# Altium PCB MAGI'sMicroSD_SDIO.PcbDoc
Units mil, origin at the board's own origin, x right, y up, seen from the top; angles counter-clockwise.
Board outline 6000 x 4000 mil, 2 copper layers (Top Layer, Bottom Layer); 5 components, 8 nets, 83 pads, 6 vias.
Unrouted connection lines stored in the file: 1.
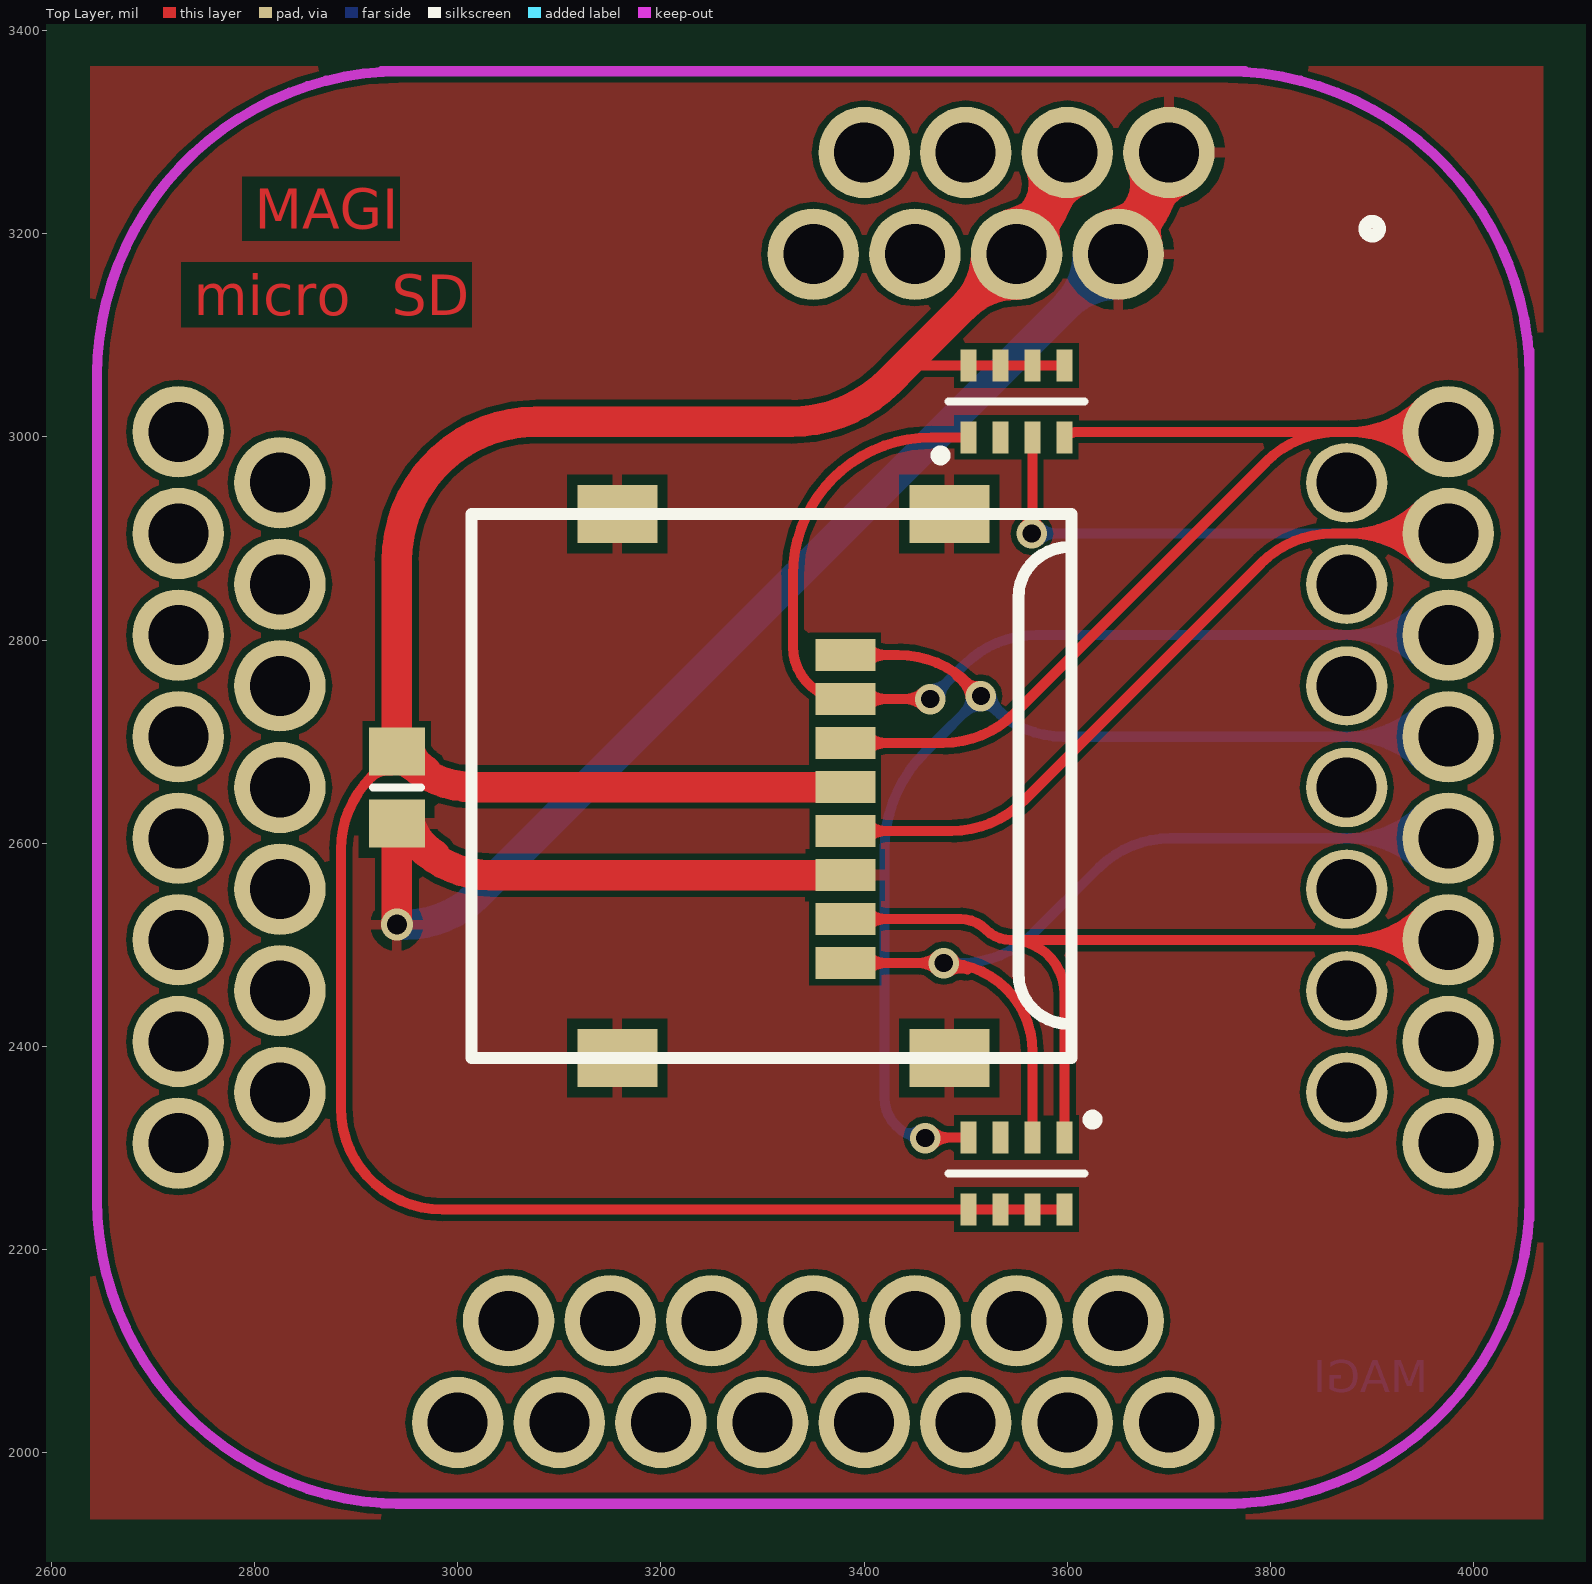
[diagram p0: Top Layer view]
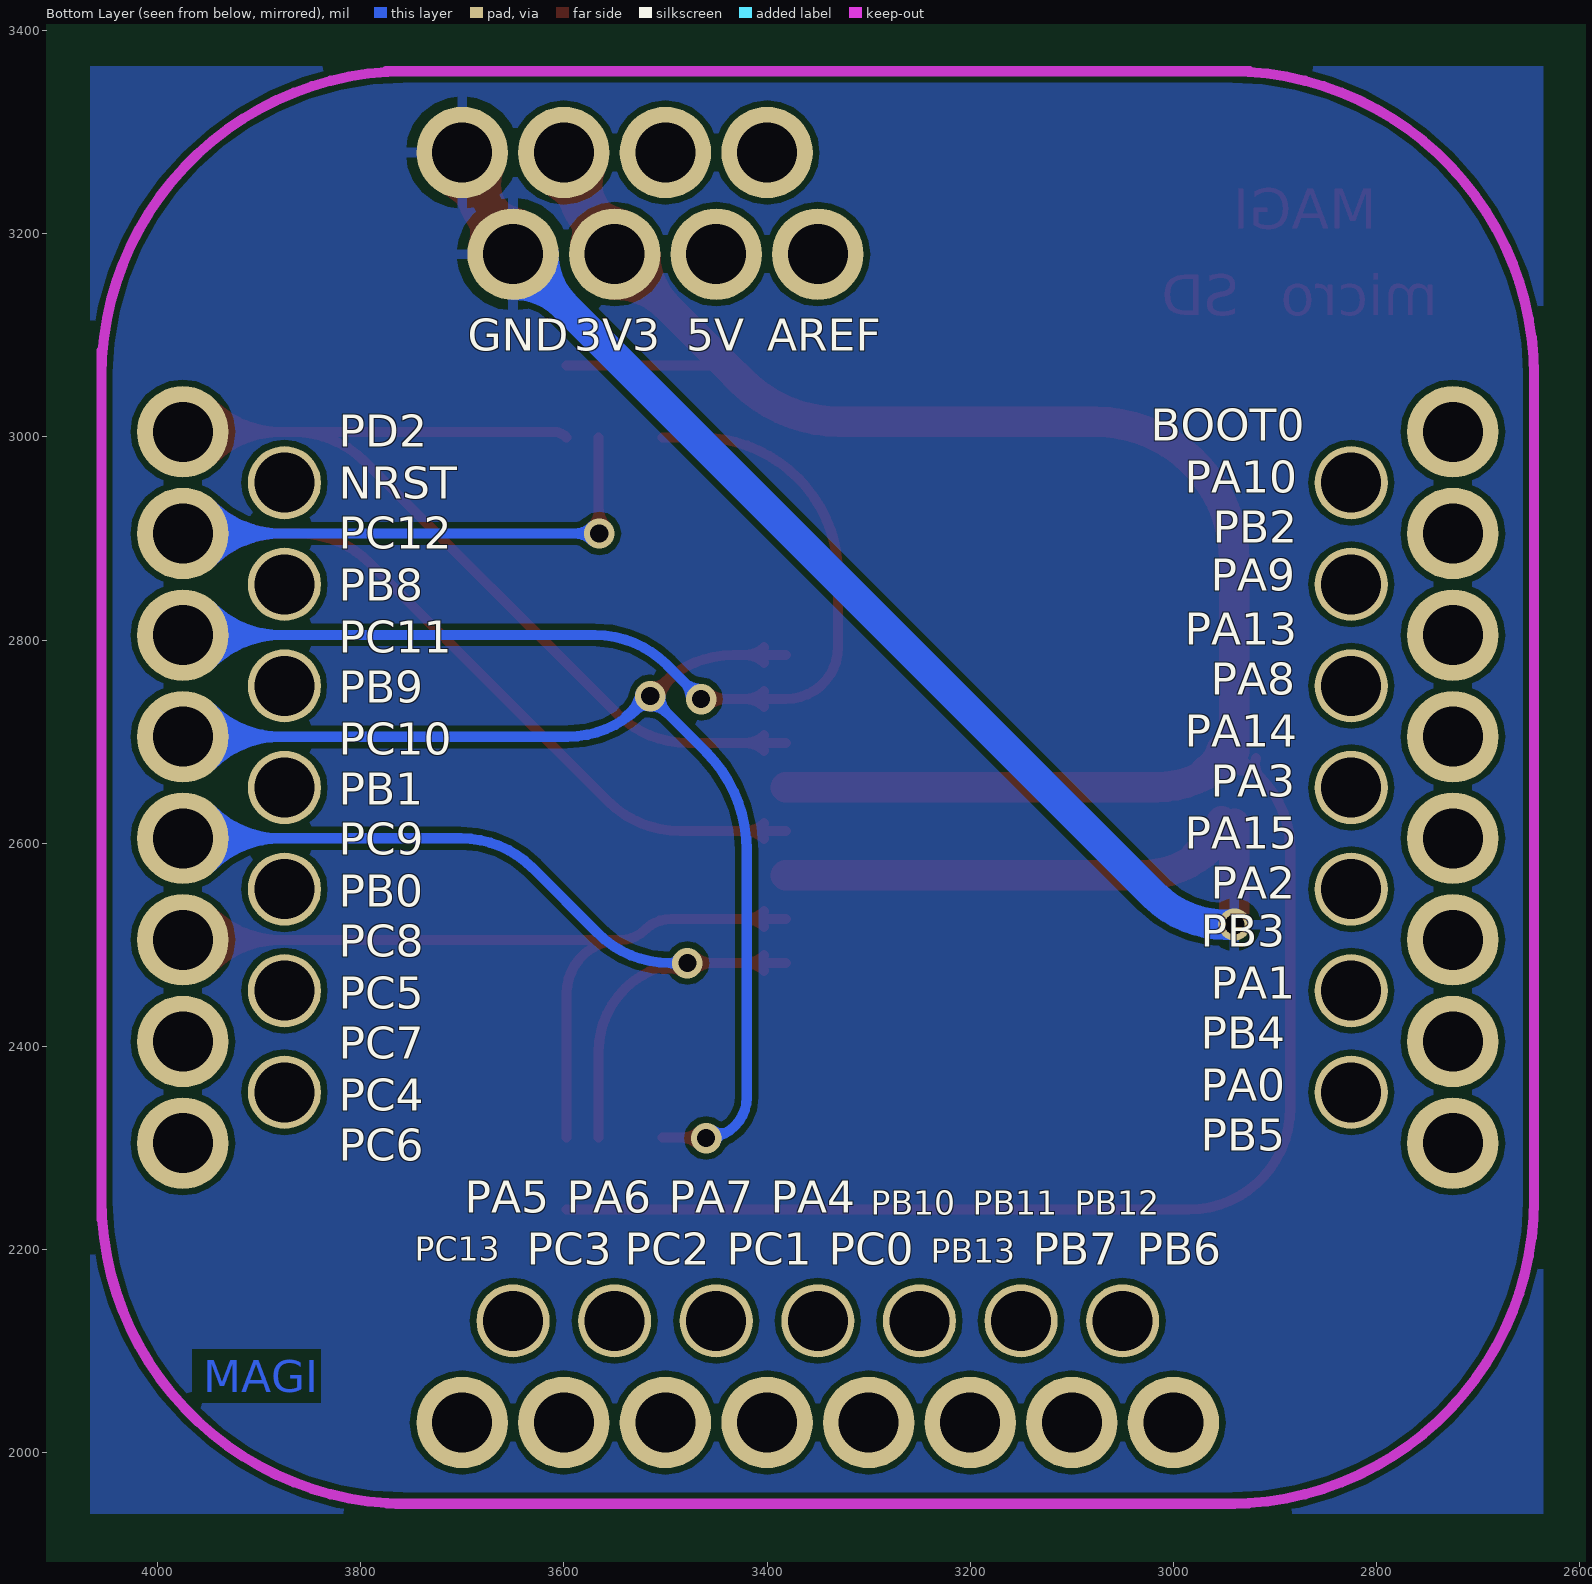
[diagram p1: Bottom Layer view, seen from below]

## Layer stack, top to bottom
Top Solder: solder mask 0.4, Solder Resist, Dk 3.5
Top Layer: signal copper 1.4
Dielectric 1: dielectric 12.6, FR-4, Dk 4.8
Bottom Layer: signal copper 1.4
Bottom Solder: solder mask 0.4, Solder Resist, Dk 3.5

## Board outline
1000,1000 7000,1000 7000,5000 1000,5000

## Design rules (kind name [scope] priority, off if disabled: settings)
Clearance [All] p1: gap=6
PolygonConnect [All] p1: connectstyle=Relief reliefconductorwidth=10 reliefentries=4 polygonreliefangle="90 Angle" airgapwidth=10
RoutingVias [All] p1: holewidth=28 width=50 viastyle="Through Hole" minholewidth=28 minwidth=50 maxholewidth=28 maxwidth=50
SolderMaskExpansion [All] p1: expansion=4
Width [All] p1: maxlimit=100 minlimit=6 preferedwidth=30
29 further rules are at their usual default settings.

## Components (designator, comment, footprint, x,y, rotation, side; value= is the part's Value field where it differs from the comment)
C1 "10uf" 6-0805_N 2940,2655 r270 top
J1 "MAGIsBoard-2x" MAGIsBoard-2x 3350,2655 r0 top
J2 "MicroSD" microsd 3285,2560 r270 top
R1 "0603*4" 0603*4 3550,3035 r90 top
R2 "0603*4" 0603*4 3550,2275 r270 top

## Footprints (in the part's own frame and the unit in brackets; to place one, negate y for a bottom-side part, rotate by r counter-clockwise, add the part's x,y. Pads: shape width x height; smd on the part's side, far side on the other; paste and mask are expansions set on the pad)
6-0805_N [mm] "Chip Resistor, Body 2.0x1.2mm, IPC Medium Density"
  rect 1.2x1.4 smd: 1(-0.9,0) 2(0.9,0)
  silkscreen extent 0,-0.6 0,0.6, body extent -1.07,-0.7 1.07,0.7, height 0.7
0603*4 [mm]
  rect 0.8x0.4 smd: 1(-0.9,1.2) 2(-0.9,0.4) 3(-0.9,-0.4) 4(-0.9,-1.2) 5(0.9,-1.2) 6(0.9,-0.4) 7(0.9,0.4) 8(0.9,1.2)
  silkscreen extent -1.47,-1.7 0,2.02
MAGIsBoard-2x [mil]
  round 90 hole 59.06: 1(300,525) 1(350,625) 2(200,525) 2(250,625) 3(100,525) 3(150,625) 4(0,525) 4(50,625) 29(-625,350) 30(-625,250) 31(-625,150) 32(-625,50) 33(-625,-50) 34(-625,-150) 35(-625,-250) 36(-625,-350) 37(-350,-625) 38(-250,-625) 39(-150,-625) 40(-50,-625) 41(50,-625) 42(150,-625) 43(250,-625) 44(350,-625) 45(625,-350) 46(625,-250) 47(625,-150) 48(625,-50) 49(625,50) 50(625,150) 51(625,250) 52(625,350)
  round 90 / inner round 72 / far side round 72 hole 59.06: 8(-525,300) 9(-525,200) 10(-525,100) 11(-525,0) 12(-525,-100) 13(-525,-200) 14(-525,-300) 15(-300,-525) 16(-200,-525) 17(-100,-525) 18(0,-525) 19(100,-525) 20(200,-525) 21(300,-525)
  oval 80x78 / inner round 72 / far side round 72 hole 59.06: 22(525,-300) 23(525,-200) 24(525,-100) 25(525,0) 26(525,100) 27(525,200) 28(525,300)
  Keep-Out Layer lines w10: -705,-415 -705,415 ; -705,-405 ccw(c-405,-405) -405,-705 ; -705,405 cw(c-405,405) -405,705 ; -425,705 425,705 ; -410,-705 415,-705 ; 405,-705 ccw(c405,-405) 705,-405 ; 405,705 cw(c405,405) 705,405 ; 705,-425 705,430
  silkscreen extent 543,543 557,557
microsd [mm]
  rect 1.45x2 smd: 0(-9.25,5.05) 0(-9.25,-3.25) 0(4.35,5.05) 0(4.35,-3.25)
  rect 0.8x1.5 smd: 1(-5.725,2.45) 2(-4.625,2.45) 3(-3.525,2.45) 4(-2.425,2.45) 5(-1.325,2.45) 6(-0.225,2.45) 7(0.875,2.45) 8(1.975,2.45)
  silkscreen extent -9.25,-6.9 4.35,8.1

## Part data
C1: library part "CAPACITOR POL", "Capacitor"

## Via types
v1: diameter 30, hole 18, Top Layer to Bottom Layer, 5 vias
v2: diameter 31.5, hole 19.68, Top Layer to Bottom Layer, 1 vias

## Nets (pads, with @x,y where several pads share a name; then routed paths per layer and width w, separated by ;. In a path a pad name is that pad's centre, name@x,y a point inside that pad or via, vN(x,y) a via of type N, cw(c..) or ccw(c..) an arc to the next point about the centre after c; other vN are vias at no path point)
3.3V: C1.1 J1.2 J2.4 R1.5 R1.6 R1.7 R1.8 R2.5 R2.6 R2.7 R2.8 | length 3241.9
  Top Layer w10: C1.1@2918.57,2684.05 cw(c2901.27,2677.74) 2914.29,2664.72 ; C1.1@2934.28,2671.9 ccw(c2931.89,2647.13) 2914.29,2664.72 ; C1.1 2914.29,2664.72 ; 3440,3070 cw(c3441.05,3068.95) 3441.05,3070.43 R1.8 R1.7 R1.6 R1.5 ; R2.8 R2.7 R2.6 R2.5 2985,2239.57 cw(c2985,2339.57) 2885,2339.57 2885,2594.01 cw(c2985,2594.01) 2914.29,2664.72
  Top Layer w30: C1.1@2952.27,2692.66 ccw(c2985.71,2701.63) 2968.4,2671.64 ; J2.4 3016.38,2655.47 cw(c3016.38,2755.47) 2945.67,2684.76 C1.1 2940,2878 cw(c3077,2878) 3077,3015 3328.25,3015 ccw(c3328.25,3152) 3425.13,3055.13 3440,3070 3564.64,3194.64 ccw(c3479.29,3280) J1.2@3600,3280 ; J1.2@3520,3180 cw(c3447.57,3180) 3498.79,3128.79 cw(c3550,3077.57) J1.2@3550,3150 ; J1.2@3542.24,3208.98 ccw(c3518.75,3296.61) J1.2@3597.33,3251.25 ; J1.2@3564.12,3218.04 ccw(c3533.27,3248.89) J1.2@3572.81,3267.32 ; J1.2@3575.82,3262.24 cw(c3535.47,3232.61) 3583.83,3219.65 cw(c3632.19,3206.69) J1.2@3612.06,3252.53 ; J1.2@3578.98,3187.76 cw(c3631.26,3201.77) 3584.38,3228.84
CLK: J1.51 J2.5 R1.3 | length 2010.2
  Top Layer w10: J2.5 3485.74,2612.17 ccw(c3485.74,2712.17) 3556.45,2641.45 3790.71,2875.71 cw(c3861.42,2805) 3861.42,2905 J1.51 ; J2.5@3402.84,2604.57 cw(c3421.18,2586.22) 3421.18,2612.17 cw(c3421.18,2638.11) J2.5@3402.84,2619.77 ; v1@3557.93,2912.07 ccw(c3539.05,2930.95) 3565.75,2930.95 ; v1(3565,2905) ccw(c3563.19,2906.81) 3565.75,2906.81 R1.3 ; 3565.75,2927.34 ccw(c3587.34,2927.34) v1@3572.07,2912.07 ; J1.51@3946.72,2876.72 ccw(c3878.43,2808.43) 3878.43,2905 ccw(c3878.43,3001.57) J1.51@3946.72,2933.28 ; J1.51@3953.79,2883.79 ccw(c3902.57,2832.57) 3902.57,2905 ccw(c3902.57,2977.43) J1.51@3953.79,2926.21 ; J1.51@3960.86,2890.86 ccw(c3926.72,2856.72) 3926.72,2905 ccw(c3926.72,2953.28) J1.51@3960.86,2919.14
  Bottom Layer w10: v1(3565,2905) J1.51 ; v1@3572.07,2897.93 cw(c3589.14,2880.86) 3589.14,2905 cw(c3589.14,2929.14) v1@3572.07,2912.07 ; J1.51@3946.72,2876.72 ccw(c3878.43,2808.43) 3878.43,2905 ccw(c3878.43,3001.57) J1.51@3946.72,2933.28 ; J1.51@3953.79,2883.79 ccw(c3902.57,2832.57) 3902.57,2905 ccw(c3902.57,2977.43) J1.51@3953.79,2926.21 ; J1.51@3960.86,2890.86 ccw(c3926.72,2856.72) 3926.72,2905 ccw(c3926.72,2953.28) J1.51@3960.86,2919.14
CMD: J1.52 J2.3 R1.4 | length 1364.5
  Top Layer w10: J2.3 3477.36,2698.78 ccw(c3477.36,2798.78) 3548.07,2728.07 3795.71,2975.71 cw(c3866.42,2905) 3866.42,3005 ; J2.3@3402.84,2691.18 cw(c3421.18,2672.83) 3421.18,2698.78 cw(c3421.18,2724.73) J2.3@3402.84,2706.38 ; R1.4 cw(c3610.36,2986.45) 3610.36,3005 3866.42,3005 ; J1.52@3946.72,2976.72 ccw(c3878.43,2908.43) 3878.43,3005 ccw(c3878.43,3101.57) J1.52@3946.72,3033.28 ; J1.52@3953.79,2983.79 ccw(c3902.57,2932.57) 3902.57,3005 ccw(c3902.57,3077.43) J1.52@3953.79,3026.21 ; J1.52@3960.86,2990.86 ccw(c3926.72,2956.72) 3926.72,3005 ccw(c3926.72,3053.28) J1.52@3960.86,3019.14 ; J1.52 3866.42,3005
D0: J1.47 J2.7 R2.1 | length 1206
  Top Layer w10: J2.7 3494.53,2525.55 cw(c3494.53,2489.53) 3520,2515 ccw(c3544.14,2539.14) 3544.14,2505 ; J2.7@3402.84,2517.95 cw(c3421.18,2499.6) 3421.18,2525.55 cw(c3421.18,2551.5) J2.7@3402.84,2533.15 ; R2.1 3597.24,2451.9 ccw(c3544.14,2451.9) 3544.14,2505 ; J1.47@3946.72,2476.72 ccw(c3878.43,2408.43) 3878.43,2505 ccw(c3878.43,2601.57) J1.47@3946.72,2533.28 ; J1.47@3953.79,2483.79 ccw(c3902.57,2432.57) 3902.57,2505 ccw(c3902.57,2577.43) J1.47@3953.79,2526.21 ; J1.47@3960.86,2490.86 ccw(c3926.72,2456.72) 3926.72,2505 ccw(c3926.72,2553.28) J1.47@3960.86,2519.14 ; J1.47 3544.14,2505
D1: J1.48 J2.8 R2.2 | length 1336.7
  Top Layer w10: J2.8 v1(3478.35,2482.24) cw(c3478.35,2394.84) 3565.75,2394.84 R2.2 ; J2.8@3402.84,2474.64 cw(c3421.18,2456.3) 3421.18,2482.24 cw(c3421.18,2508.19) J2.8@3402.84,2489.84 ; v1@3471.28,2475.17 ccw(c3454.2,2458.1) 3454.2,2482.24 ccw(c3454.2,2506.39) v1@3471.28,2489.32 ; v1@3483.36,2473.59 cw(c3495.45,2452.7) 3501.67,2476.02 cw(c3507.9,2499.35) v1@3487,2487.25
  Bottom Layer w10: v1(3478.35,2482.24) 3495.82,2482.24 ; v1@3486.97,2477.18 cw(c3495.82,2471.97) 3495.82,2482.24 ; v1@3486.97,2487.31 ccw(c3495.82,2492.51) 3495.82,2482.24 ; J1.48@3946.72,2576.72 ccw(c3878.43,2508.43) 3878.43,2605 ccw(c3878.43,2701.57) J1.48@3946.72,2633.28 ; J1.48@3953.79,2583.79 ccw(c3902.57,2532.57) 3902.57,2605 ccw(c3902.57,2677.43) J1.48@3953.79,2626.21 ; J1.48@3960.86,2590.86 ccw(c3926.72,2556.72) 3926.72,2605 ccw(c3926.72,2653.28) J1.48@3960.86,2619.14 ; J1.48 3701.42,2605 ccw(c3701.42,2505) 3630.71,2575.71 3566.53,2511.53 cw(c3495.82,2582.24) 3495.82,2482.24
D2: J1.49 J2.1 R2.4 | length 1741.9
  Top Layer w10: J2.1 3433.18,2785.39 cw(c3433.18,2685.39) 3503.9,2756.1 ; J2.1@3402.84,2777.79 cw(c3421.18,2759.45) 3421.18,2785.39 cw(c3421.18,2811.34) J2.1@3402.84,2792.99 ; v1@3467.07,2302.93 cw(c3485.19,2284.81) 3485.19,2310.43 ; v1@3467.07,2317.07 ccw(c3483.1,2333.1) 3483.1,2310.43 ; v1@3470,2310 3470.43,2310.43 R2.4 ; 3491.26,2764.89 cw(c3472.06,2737.29) v1@3505.16,2743.23 ; 3502.27,2757.24 ccw(c3510.64,2769.27) v1@3513.23,2754.84 ; v1@3505.6,2748.42 ccw(c3498.71,2750.92) 3503.9,2756.1 ; v1@3505.63,2748.48 ccw(c3499.04,2750.92) 3503.05,2756.69 ccw(c3510.14,2766.9) v1@3512.84,2754.76 ; v1@3511.58,2754.4 cw(c3509.08,2761.29) 3503.9,2756.1 ; v1(3515,2745) 3503.9,2756.1
  Bottom Layer w10: v1@3450.83,2306.02 ccw(c3435.75,2299.49) 3440,2315.36 ccw(c3444.25,2331.23) v1@3454.04,2318.03 ; v1(3460,2310) cw(c3460,2350) 3420,2350 3420,2593.25 cw(c3557,2593.25) 3460.13,2690.13 v1(3515,2745) 3525.71,2734.29 ccw(c3596.42,2805) 3596.42,2705 J1.49 ; v1@3505,2745 cw(c3480.86,2745) 3497.93,2727.93 cw(c3515,2710.86) v1@3515,2735 ; v1@3516.79,2735.16 cw(c3519.46,2720.54) 3527.91,2732.77 ; v1@3524.84,2746.79 ccw(c3557.72,2752.79) 3538.71,2725.3 ; J1.49@3946.72,2676.72 ccw(c3878.43,2608.43) 3878.43,2705 ccw(c3878.43,2801.57) J1.49@3946.72,2733.28 ; J1.49@3953.79,2683.79 ccw(c3902.57,2632.57) 3902.57,2705 ccw(c3902.57,2777.43) J1.49@3953.79,2726.21 ; J1.49@3960.86,2690.86 ccw(c3926.72,2656.72) 3926.72,2705 ccw(c3926.72,2753.28) J1.49@3960.86,2719.14
D3: J1.50 J2.2 R1.1 | length 1480.1
  Top Layer w10: J2.2@3402.84,2734.49 cw(c3421.18,2716.14) 3421.18,2742.09 cw(c3421.18,2768.03) J2.2@3402.84,2749.69 ; v1@3457.89,2735.02 ccw(c3440.82,2717.94) 3440.82,2742.09 ccw(c3440.82,2766.23) v1@3457.89,2749.16 ; v1@3470,2740 ccw(c3464.96,2734.96) v1(3464.96,2742.09) J2.2 cw(c3381.46,2793.54) 3330,2793.54 3330,2864.22 cw(c3464.66,2864.22) 3369.44,2959.44 cw(c3466.31,2862.57) 3466.31,2999.57 R1.1
  Bottom Layer w10: v1(3464.96,2742.09) 3498.59,2775.71 cw(c3569.3,2705) 3569.3,2805 J1.50 ; v1@3464.96,2752.09 ccw(c3464.96,2776.23) 3482.03,2759.16 ccw(c3499.1,2742.09) v1@3474.96,2742.09 ; J1.50@3946.72,2776.72 ccw(c3878.43,2708.43) 3878.43,2805 ccw(c3878.43,2901.57) J1.50@3946.72,2833.28 ; J1.50@3953.79,2783.79 ccw(c3902.57,2732.57) 3902.57,2805 ccw(c3902.57,2877.43) J1.50@3953.79,2826.21 ; J1.50@3960.86,2790.86 ccw(c3926.72,2756.72) 3926.72,2805 ccw(c3926.72,2853.28) J1.50@3960.86,2819.14
GND: C1.2 J1.1 J2.0 J2.6 | length 2065.4
  Top Layer w30: v2(2940,2520) C1.2 2961.42,2598.15 ccw(c3032.13,2668.86) 3032.13,2568.86 J2.6 ; C1.2@2952.27,2621.8 ccw(c3004.72,2635.85) 2977.57,2588.82 ; J1.1@3642.24,3208.98 ccw(c3618.75,3296.61) J1.1@3697.33,3251.25 ; J1.1@3650,3180 3664.64,3194.64 ccw(c3579.29,3280) J1.1@3700,3280 ; J1.1@3664.12,3218.04 ccw(c3633.27,3248.89) J1.1@3672.81,3267.32 ; J1.1@3675.82,3262.24 cw(c3635.47,3232.61) 3683.83,3219.65 cw(c3732.19,3206.69) J1.1@3712.06,3252.53 ; J1.1@3678.98,3187.76 cw(c3731.26,3201.77) 3684.38,3228.84
  Bottom Layer w30: v2(2940,2520) 2948.58,2520 ccw(c2948.58,2620) 3019.29,2549.29 J1.1@3650,3180 ; J1.1@3620,3180 cw(c3547.57,3180) 3598.79,3128.79 cw(c3650,3077.57) J1.1@3650,3150
pads on no net: J1.3 J1.4 J1.8 J1.9 J1.10 J1.11 J1.12 J1.13 J1.14 J1.15 J1.16 J1.17 J1.18 J1.19 J1.20 J1.21 J1.22 J1.23 J1.24 J1.25 J1.26 J1.27 J1.28 J1.29 J1.30 J1.31 J1.32 J1.33 J1.34 J1.35 J1.36 J1.37 J1.38 J1.39 J1.40 J1.41 J1.42 J1.43 J1.44 J1.45 J1.46 R1.2 R2.3

## Polygon pours and split planes (outlines as drawn)
GND on Top Layer "Bottom Layer-No Net" (solid, pour order 2): 2638.2,3365 4068.2,3365 4068.2,1934.66 2638.2,1934.66
GND on Bottom Layer "Bottom Layer-No Net" (solid, pour order 4): 2636.22,3365 4066.22,3365 4066.22,1940 2636.22,1940

## Other copper
Top Layer:
  text "MAGI" at 2800,3205 h39.37
  text "micro" at 2740,3120 h40
  text "SD" at 2935,3120 h40

## Text inside footprints (layer, text, board x,y; h text height)
J1: Bottom Overlay "NRST" at 3821.54,2939.33 h31.5; Bottom Overlay "PB8" at 3821.54,2838.94 h31.5; Bottom Overlay "PB9" at 3821.54,2738.54 h31.5; Bottom Overlay "PB1" at 3821.54,2638.15 h31.5; Bottom Overlay "PB0" at 3821.54,2537.76 h31.5; Bottom Overlay "PC5" at 3821.54,2437.36 h31.5; Bottom Overlay "PC4" at 3821.54,2336.97 h31.5; Bottom Overlay "PA0" at 2973.11,2346.81 h31.5; Bottom Overlay "PA1" at 2963.27,2447.2 h31.5; Bottom Overlay "PA2" at 2963.27,2545.63 h31.5; Bottom Overlay "PA3" at 2963.27,2646.02 h31.5; Bottom Overlay "PA8" at 2963.27,2746.42 h31.5; Bottom Overlay "PA9" at 2963.27,2848.78 h31.5; Bottom Overlay "PA10" at 2988.86,2945.24 h31.5; Bottom Overlay "BOOT0" at 3022.32,2996.42 h31.5; Bottom Overlay "PB2" at 2961.3,2896.02 h31.5; Bottom Overlay "PA13" at 2988.86,2795.63 h31.5; Bottom Overlay "PA14" at 2988.86,2695.24 h31.5; Bottom Overlay "PA15" at 2988.86,2594.84 h31.5; Bottom Overlay "PB3" at 2973.11,2498.39 h31.5; Bottom Overlay "PB4" at 2973.11,2397.99 h31.5; Bottom Overlay "PB5" at 2973.11,2297.6 h31.5; Bottom Overlay "PB12" at 3097.13,2234.61 h23.62; Bottom Overlay "PB11" at 3197.52,2234.61 h23.62; Bottom Overlay "PB10" at 3297.91,2234.61 h23.62; Bottom Overlay "PA4" at 3396.34,2236.57 h31.5; Bottom Overlay "PA7" at 3496.73,2236.57 h31.5; Bottom Overlay "PA6" at 3597.13,2236.57 h31.5; Bottom Overlay "PA5" at 3697.52,2236.57 h31.5; Bottom Overlay "PB6" at 3036.1,2185.39 h31.5; Bottom Overlay "PB7" at 3138.46,2185.39 h31.5; Bottom Overlay "PB13" at 3238.86,2187.36 h23.62; Bottom Overlay "PC0" at 3339.25,2185.39 h31.5; Bottom Overlay "PC1" at 3439.65,2185.39 h31.5; Bottom Overlay "PC2" at 3540.04,2185.39 h31.5; Bottom Overlay "PC3" at 3636.5,2185.39 h31.5; Bottom Overlay "PC13" at 3746.73,2189.33 h23.62; Bottom Overlay "PC6" at 3821.54,2287.76 h31.5; Bottom Overlay "PC7" at 3821.54,2388.15 h31.5; Bottom Overlay "PC8" at 3821.54,2488.54 h31.5; Bottom Overlay "PC9" at 3821.54,2588.94 h31.5; Bottom Overlay "PC10" at 3821.54,2687.36 h31.5; Bottom Overlay "PC11" at 3821.54,2787.76 h31.5; Bottom Overlay "PC12" at 3821.54,2890.12 h31.5; Bottom Overlay "PD2" at 3821.54,2990.51 h31.5; Bottom Overlay "GND" at 3694.57,3084.84 h31.5; Bottom Overlay "3V3" at 3589.57,3084.84 h31.5; Bottom Overlay "5V" at 3479.57,3084.84 h31.5; Bottom Overlay "AREF" at 3399.57,3084.84 h31.5; Bottom Layer "MAGI" at 3955,2060 h31.5
R2: Mechanical 1 "R1" at 3535.62,2262.01 h21.65